# Altium PCB PCB1.PcbDoc
Units mm, origin at the board's own origin, x right, y up, seen from the top; angles counter-clockwise.
Board outline 60.2 x 60.2 mm, 2 copper layers (Top Layer, Bottom Layer); 4 components, 5 nets, 42 pads, 0 vias.
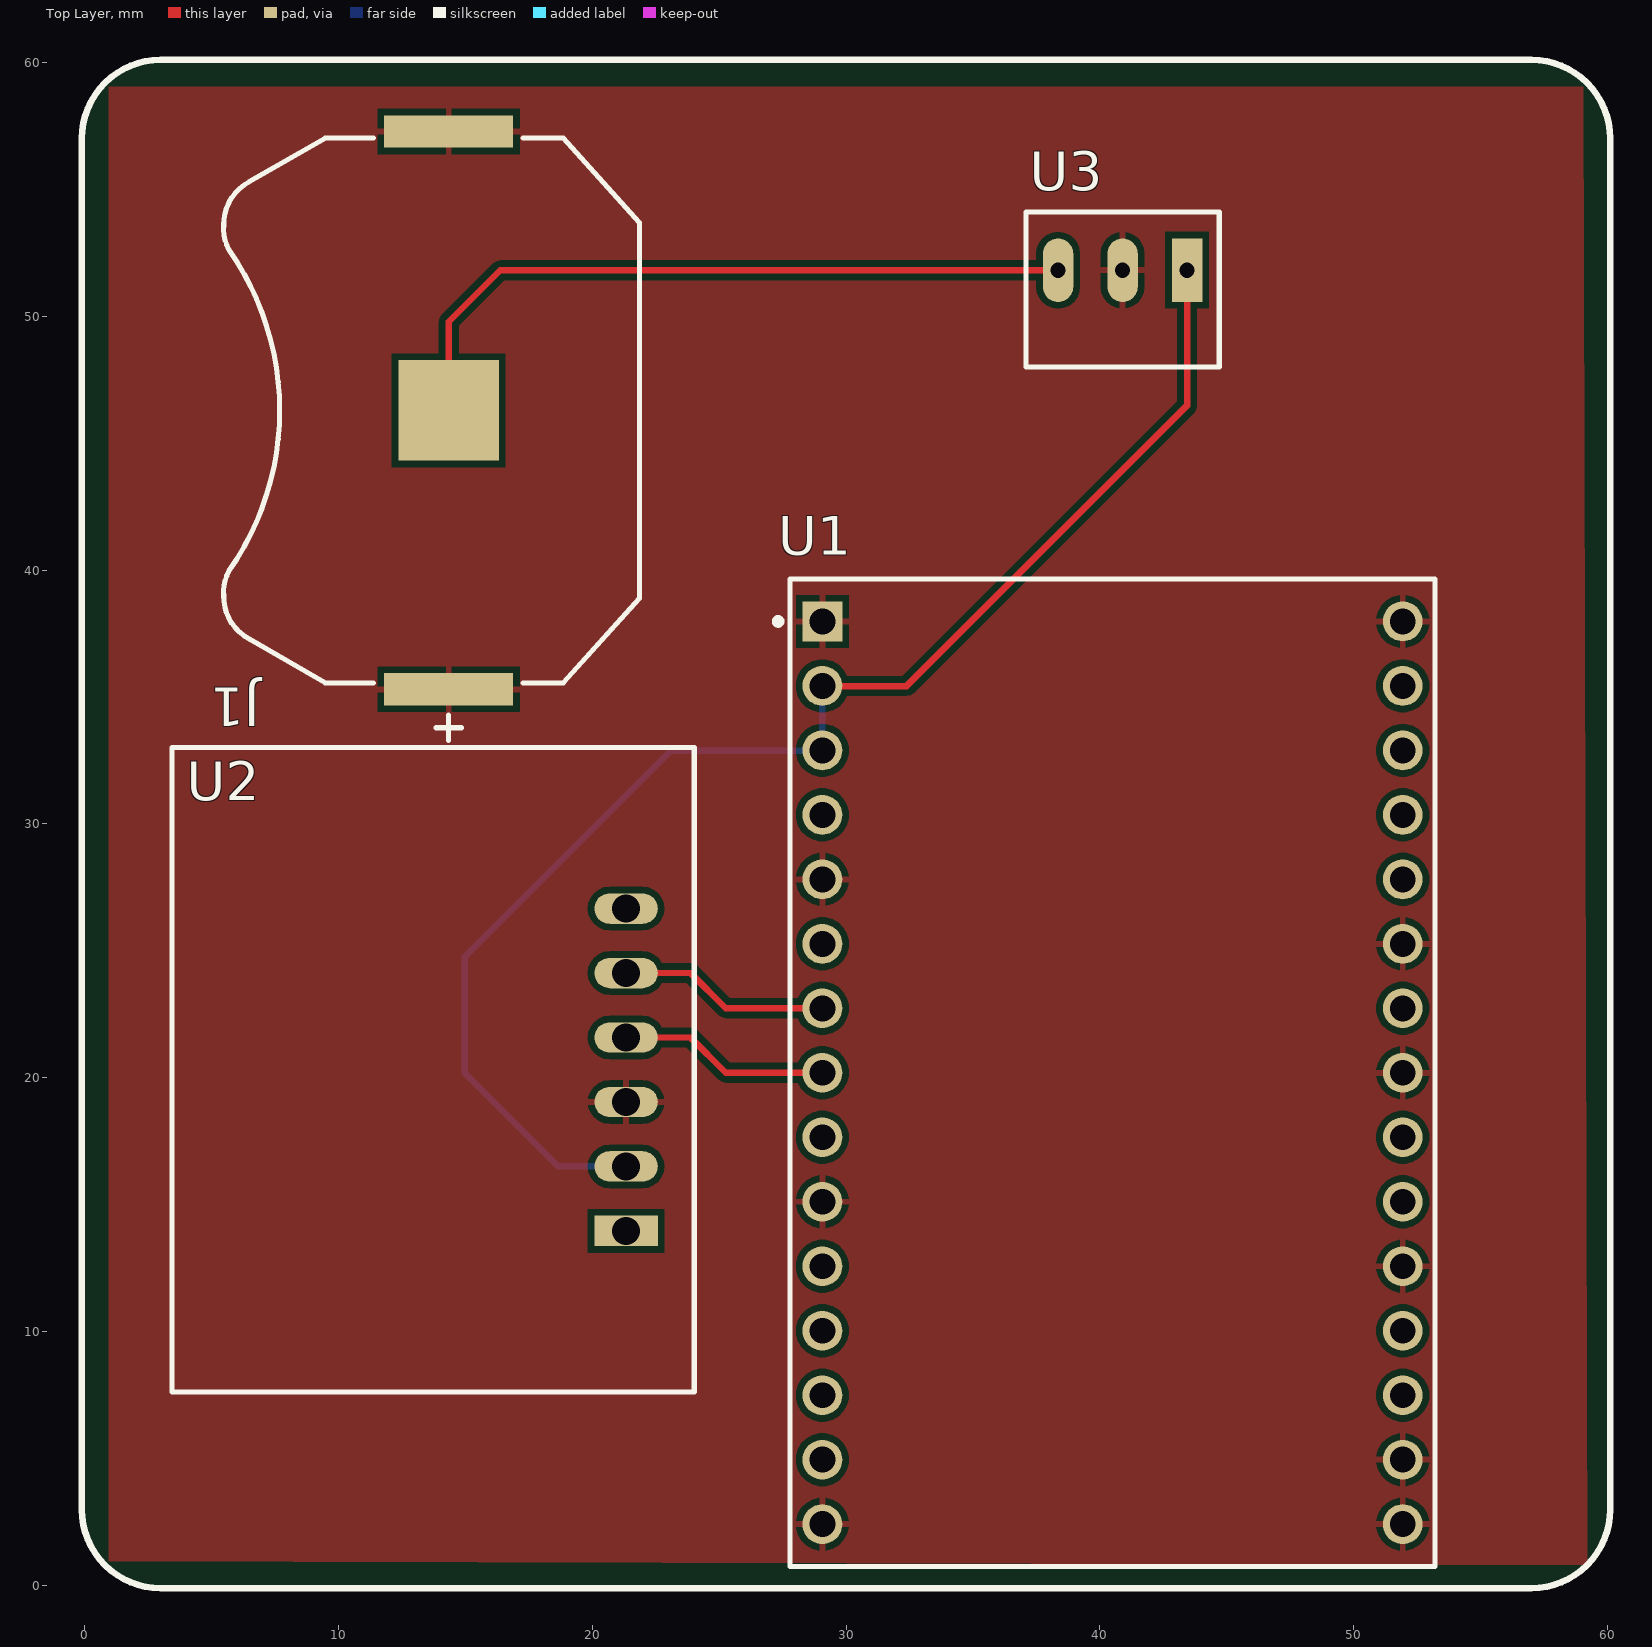
[diagram p0: Top Layer view]
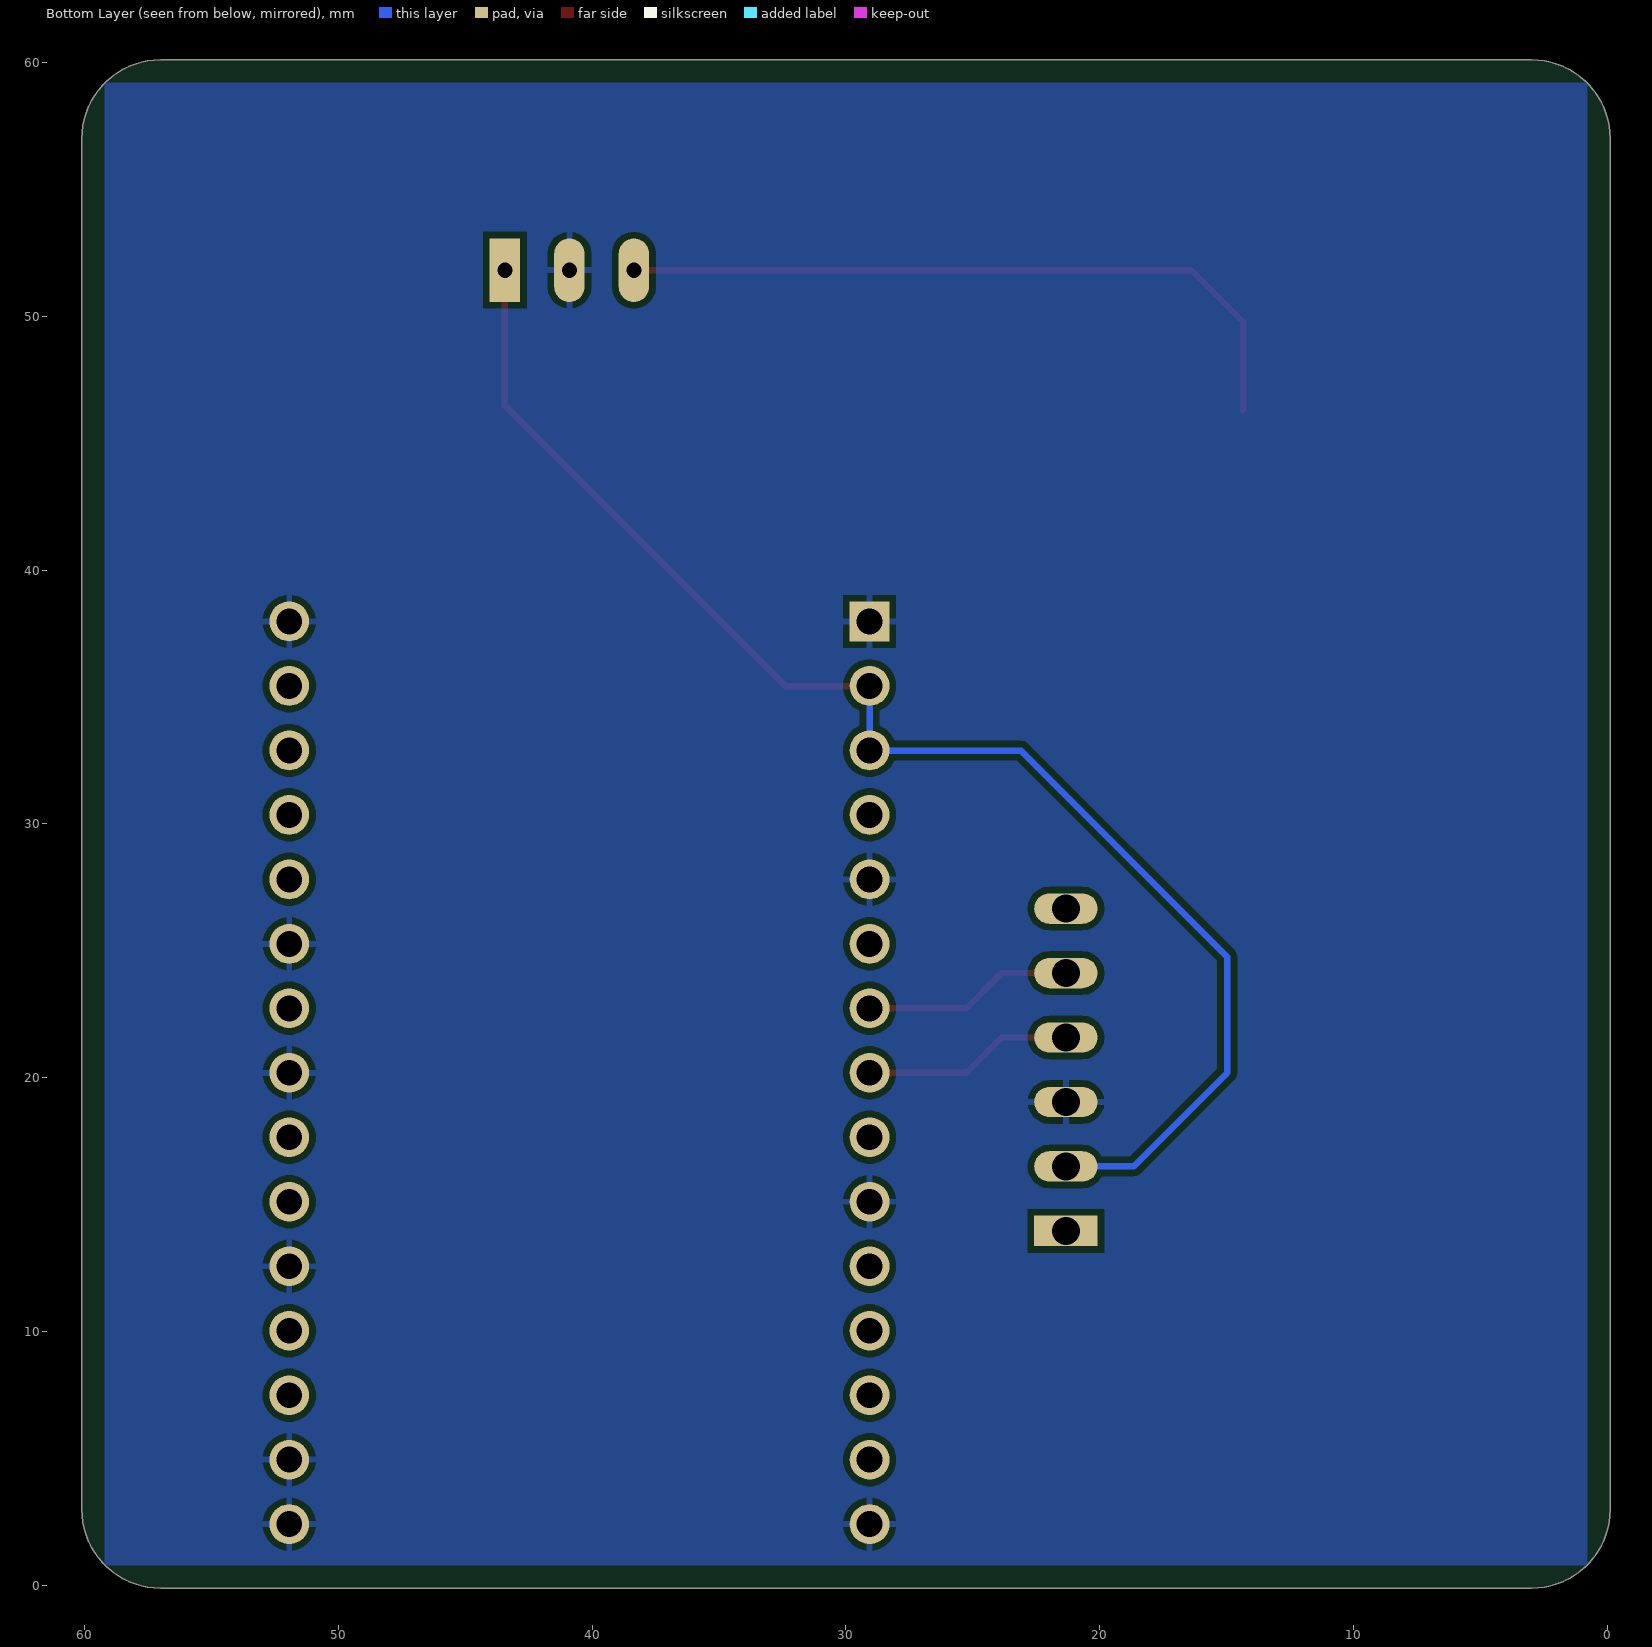
[diagram p1: Bottom Layer view, seen from below]
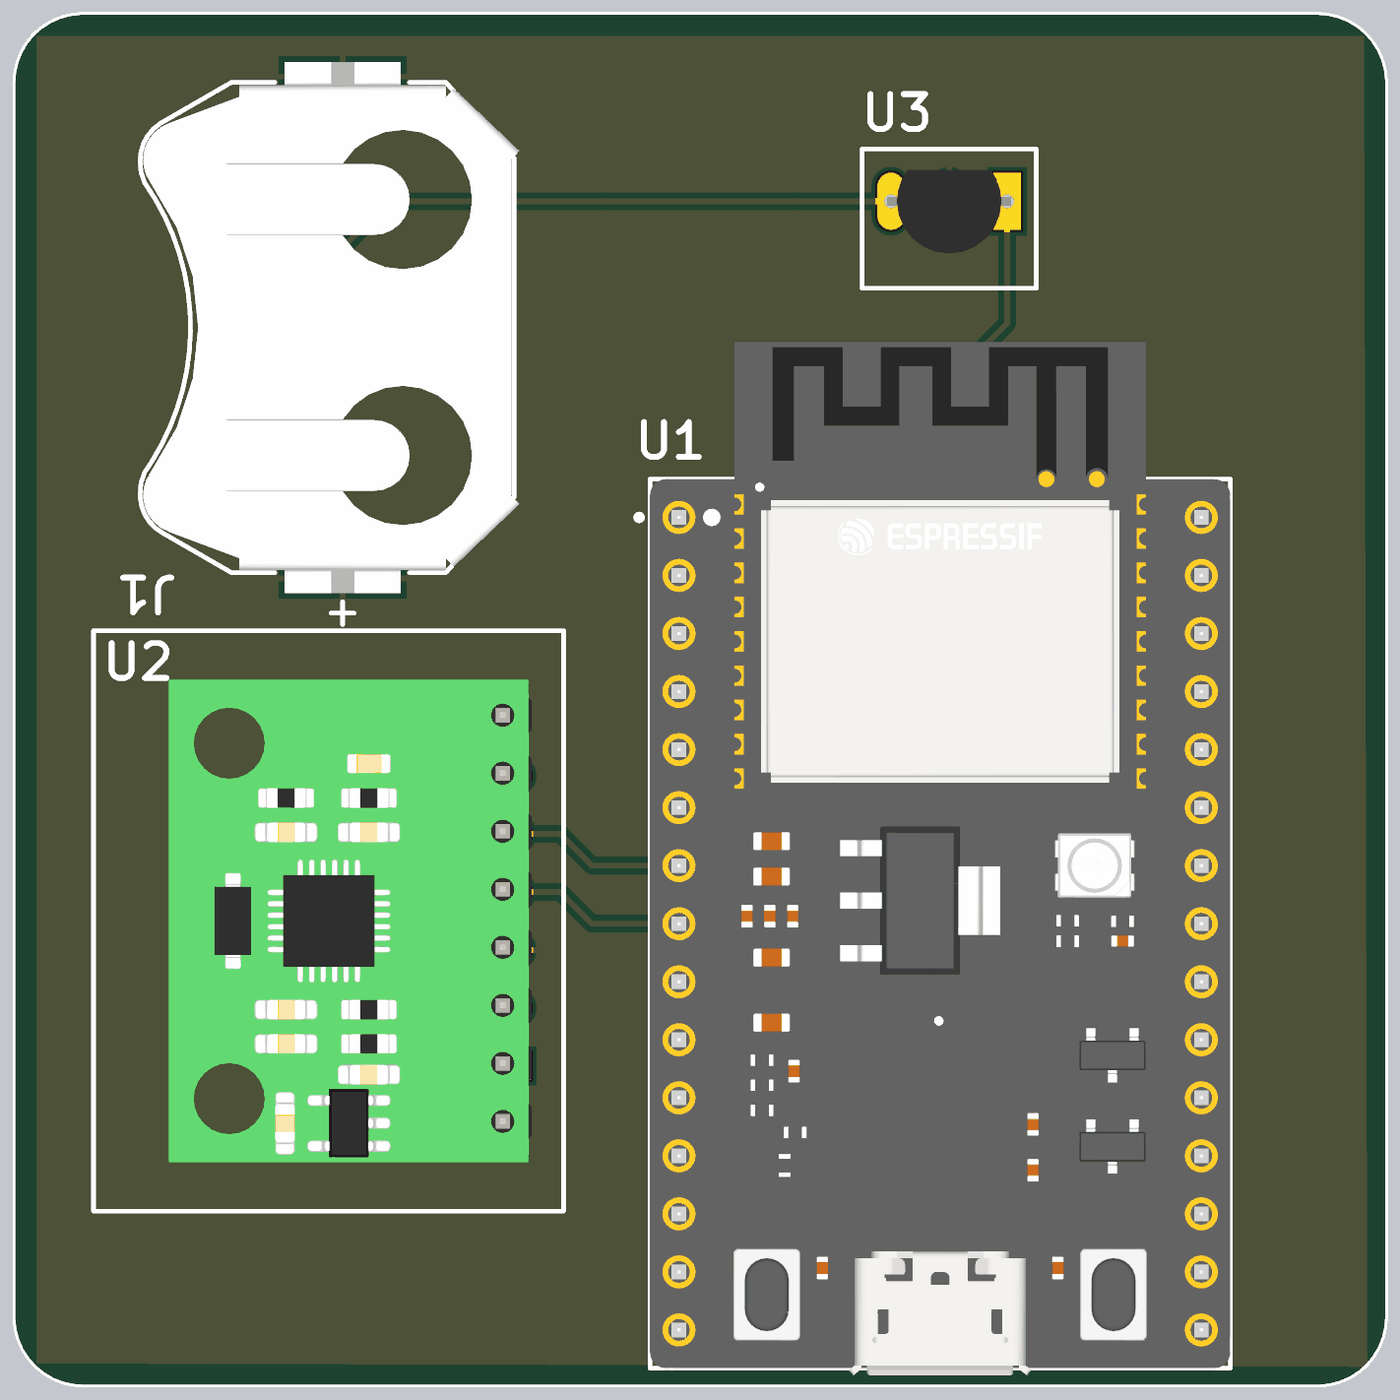
[diagram p2: 3D render of the assembled board from above, using the file's embedded part models]

## Layer stack, top to bottom
Top Solder: solder mask 0.0102, Solder Resist, Dk 3.5
Top Layer: signal copper 0.0356
Dielectric 1: dielectric 0.32, FR-4, Dk 4.8
Bottom Layer: signal copper 0.0356
Bottom Solder: solder mask 0.0102, Solder Resist, Dk 3.5

## Board outline
-0.102,3 ccw(c3,3) 3,-0.102 57,-0.102 ccw(c57,3) 60.102,3 60.102,57 ccw(c57,57) 57,60.102 3,60.102 ccw(c3,57) -0.102,57

## Design rules (kind name [scope] priority, off if disabled: settings)
Clearance [All] p1: gap=0.254 ignorepadtopadclearanceinfootprint=FALSE
PolygonConnect [All] p1: connectstyle=Relief reliefconductorwidth=0.254 reliefentries=4 polygonreliefangle="90 Angle" airgapwidth=0.254
RoutingVias [All] p1: holewidth=0.711 width=1.27 viastyle="Through Hole" minholewidth=0.711 minwidth=1.27 maxholewidth=0.711 maxwidth=1.27
SolderMaskExpansion [All] p1: expansion=0.102 istentingtop=FALSE
Width [All] p1: maxlimit=0.254 minlimit=0.254 preferedwidth=0.254
30 further rules are at their usual default settings.

## Components (designator, comment, footprint, x,y, rotation, side; value= is the part's Value field where it differs from the comment)
J1 "CR3032 battery holder" FP-3034TR-MFG 13.678,46.291 r90 top
U1 "ESP32" FP-ESP32-C3-DevKitC-02-MFG 40.5,20.2 r0 top
U2 "MPU6050 6-DoF Accelerometer" MPU6050 13.736,20.32 r180 top
U3 "Voltage regulator" AP7381-50V-A 40.894,51.816 r270 top

## Footprints (in the part's own frame and the unit in brackets; to place one, negate y for a bottom-side part, rotate by r counter-clockwise, add the part's x,y. Pads: shape width x height; smd on the part's side, far side on the other; paste and mask are expansions set on the pad)
AP7381-50V-A [mm]
  rect 2.5x1.2 hole 0.6: 1(0,2.54)
  oval 2.5x1.2 hole 0.6: 2(0,0) 3(0,-2.54)
  silkscreen extent -2.29,-3.81 3.81,3.81, body extent -1.37,-2.7 2.29,2.7, height 9.83
FP-3034TR-MFG [mil]
  rect 156x156 smd paste-39370.1 mask+0: 1(0,-26.5)
  rect 50x200 smd paste+0 mask+0: 2(-432.48,-26.5) 2(432.48,-26.5)
  silkscreen extent -512,-322 422,323, body extent -461,-326 461,326, height 10
FP-ESP32-C3-DevKitC-02-MFG [mm]
  rect 1.57x1.57 hole 1.02 paste-2539.97 mask+0: 1(-11.43,17.78)
  round 1.57 hole 1.02 paste-2539.97 mask+0: 2(-11.43,15.24) 3(-11.43,12.7) 4(-11.43,10.16) 5(-11.43,7.62) 6(-11.43,5.08) 7(-11.43,2.54) 8(-11.43,0) 9(-11.43,-2.54) 10(-11.43,-5.08) 11(-11.43,-7.62) 12(-11.43,-10.16) 13(-11.43,-12.7) 14(-11.43,-15.24) 15(-11.43,-17.78) 16(11.43,-17.78) 17(11.43,-15.24) 18(11.43,-12.7) 19(11.43,-10.16) 20(11.43,-7.62) 21(11.43,-5.08) 22(11.43,-2.54) 23(11.43,0) 24(11.43,2.54) 25(11.43,5.08) 26(11.43,7.62) 27(11.43,10.16) 28(11.43,12.7) 29(11.43,15.24) 30(11.43,17.78)
  silkscreen extent -13.3,-19.46 12.7,19.46, body extent -12.8,-19.56 12.8,19.56, height 0.25
MPU6050 [mm]
  rect 2.5x1.2 hole 1.1: 1(-7.6,6.35)
  oval 2.5x1.2 hole 1.1: 2(-7.6,3.81) 3(-7.6,1.27) 4(-7.6,-1.27) 5(-7.6,-3.81) 6(-7.6,-6.35)
  silkscreen extent -10.29,-12.7 10.29,12.7, body extent -8.89,-10.55 6.99,10.55, height 5.94

## Part data
J1: library part 3034TR
U1: library part ESP32-C3-DEVKITC-02, Manufacturer="Espressif Systems", Supplier Part Number=1965-ESP32-C3-DEVKITC-02-ND, Category="RF Semiconductors and Devices", Manufacturer Part Number=ESP32-C3-DEVKITC-02, Pricing="1=8 (USD)", RoHS=No, Stock=1074, Supplier=Digikey
U2: library part 3886, "Apex Tool Group Ratcheting Tap and Die Set (40-Piece) 3886", Manufacturer="Adafruit Industries", Supplier Part Number=1528-3886-ND, Category=Uncategorized, Manufacturer Part Number=3886, Pricing="1=12.95 (USD)", RoHS=No, Stock=118, Supplier=Digikey
U3: library part AP7381-50V-A, "Fixed Positive LDO Regulator", Manufacturer=Diodes, Peak Reflow Temperature (Cel)=260°C, Supplier Part Number=AP7381-50V-ADICT-ND, Time @ Peak Reflow Temperature-Max (s)=30s, ComponentLink1Description=https://datasheet.ciiva.com:443/pdfs/VipMasterIC/IC/DIOD/DIOD-S-A0009691348/DIOD-S-A0009865550-1.pdf?src-supplier=IHS+Markit, ComponentLink1URL=https://datasheet.ciiva.com:443/pdfs/VipMasterIC/IC/DIOD/DIOD-S-A0009691348/DIOD-S-A0009865550-1.pdf?src-supplier=IHS+Markit, ComponentLink2Description=https://www.diodes.com/assets/Datasheets/AP7381.pdf?src-supplier=Digikey, ComponentLink2URL=https://www.diodes.com/assets/Datasheets/AP7381.pdf?src-supplier=Digikey, Manufacturer Part Number=AP7381-50V-A, Pricing="1=0.46, 10=0.374, 25=0.3424, 100=0.2547, 250=0.2308, 500=0.19102, 1000=0.14326 (USD)", Reach SVHC Compliant=Yes, Regulator Type="FIXED POSITIVE SINGLE OUTPUT LDO REGULATOR", RoHS=Yes, RoHS Compliant=Yes, Stock=6439, Supplier=Digikey

## Nets (pads, with @x,y where several pads share a name; then routed paths per layer and width w, separated by ;. In a path a pad name is that pad's centre, name@x,y a point inside that pad or via, vN(x,y) a via of type N, cw(c..) or ccw(c..) an arc to the next point about the centre after c; other vN are vias at no path point)
3Vo: U1.2 U1.3 U2.2 U3.1 | length 56.7
  Top Layer w0.254: U1.2@29.083,35.433 32.385,35.433 43.434,46.482 U3.1
  Bottom Layer w0.254: U2.2 18.669,16.51 14.986,20.193 14.986,24.765 23.114,32.893 U1.3@29.07,32.893 ; U1.3 U1.2
BAT: J1.1 U3.3 | length 28.3
  Top Layer w0.254: J1.1 14.351,49.784 16.383,51.816 U3.3
GND: J1.2 U1.1 U1.5 U1.10 U1.15 U1.16 U1.17 U1.20 U1.23 U1.25 U1.30 U2.3 U3.2
SCL: U1.8 U2.4 | length 8.3
  Top Layer w0.254: U2.4 23.876,21.59 25.266,20.2 U1.8
SDA: U1.7 U2.5 | length 8.3
  Top Layer w0.254: U2.5 23.876,24.13 25.266,22.74 U1.7
pads on no net: U1.4 U1.6 U1.9 U1.11 U1.12 U1.13 U1.14 U1.18 U1.19 U1.21 U1.22 U1.24 U1.26 U1.27 U1.28 U1.29 U2.1 U2.6

## Polygon pours and split planes (outlines as drawn)
GND on Top Layer "GND_L01_P000" (solid, pour order 0): 0.95,0.95 0.95,59.05 59.05,59.05 59.193,0.807
GND on Bottom Layer "GND_L02_P001" (solid, pour order 1): 0.807,0.807 0.807,59.193 59.193,59.193 59.193,0.807

## Silkscreen, mask and mechanical layers (free items; w line width, h text height)
Top Overlay:
  the board outline again, w0.254